# Altium PCB PCB-MAKEY_MAKEY_PTITTEAM_v1.1.PcbDoc
Units mil, origin at the board's own origin, x right, y up, seen from the top; angles counter-clockwise.
Board outline 3543.31 x 1968.5 mil, 2 copper layers (Top Layer, Bottom Layer); 48 components, 59 nets, 150 pads, 7 vias.
Unrouted connection lines stored in the file: 16.
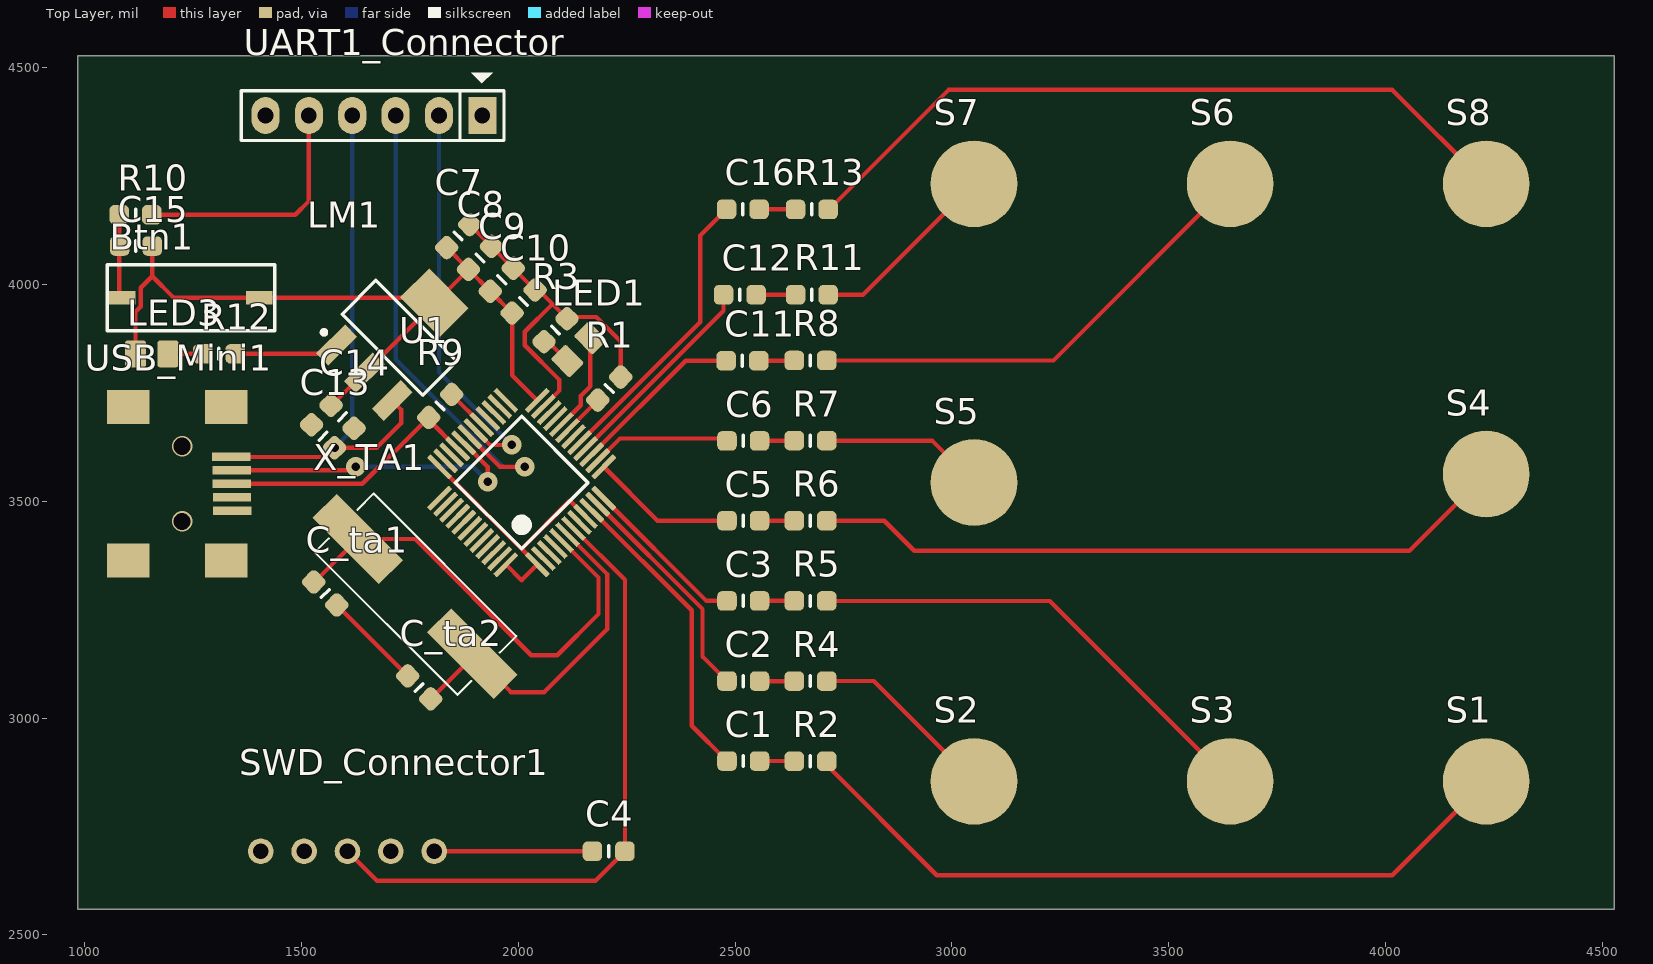
[diagram p0: Top Layer view]
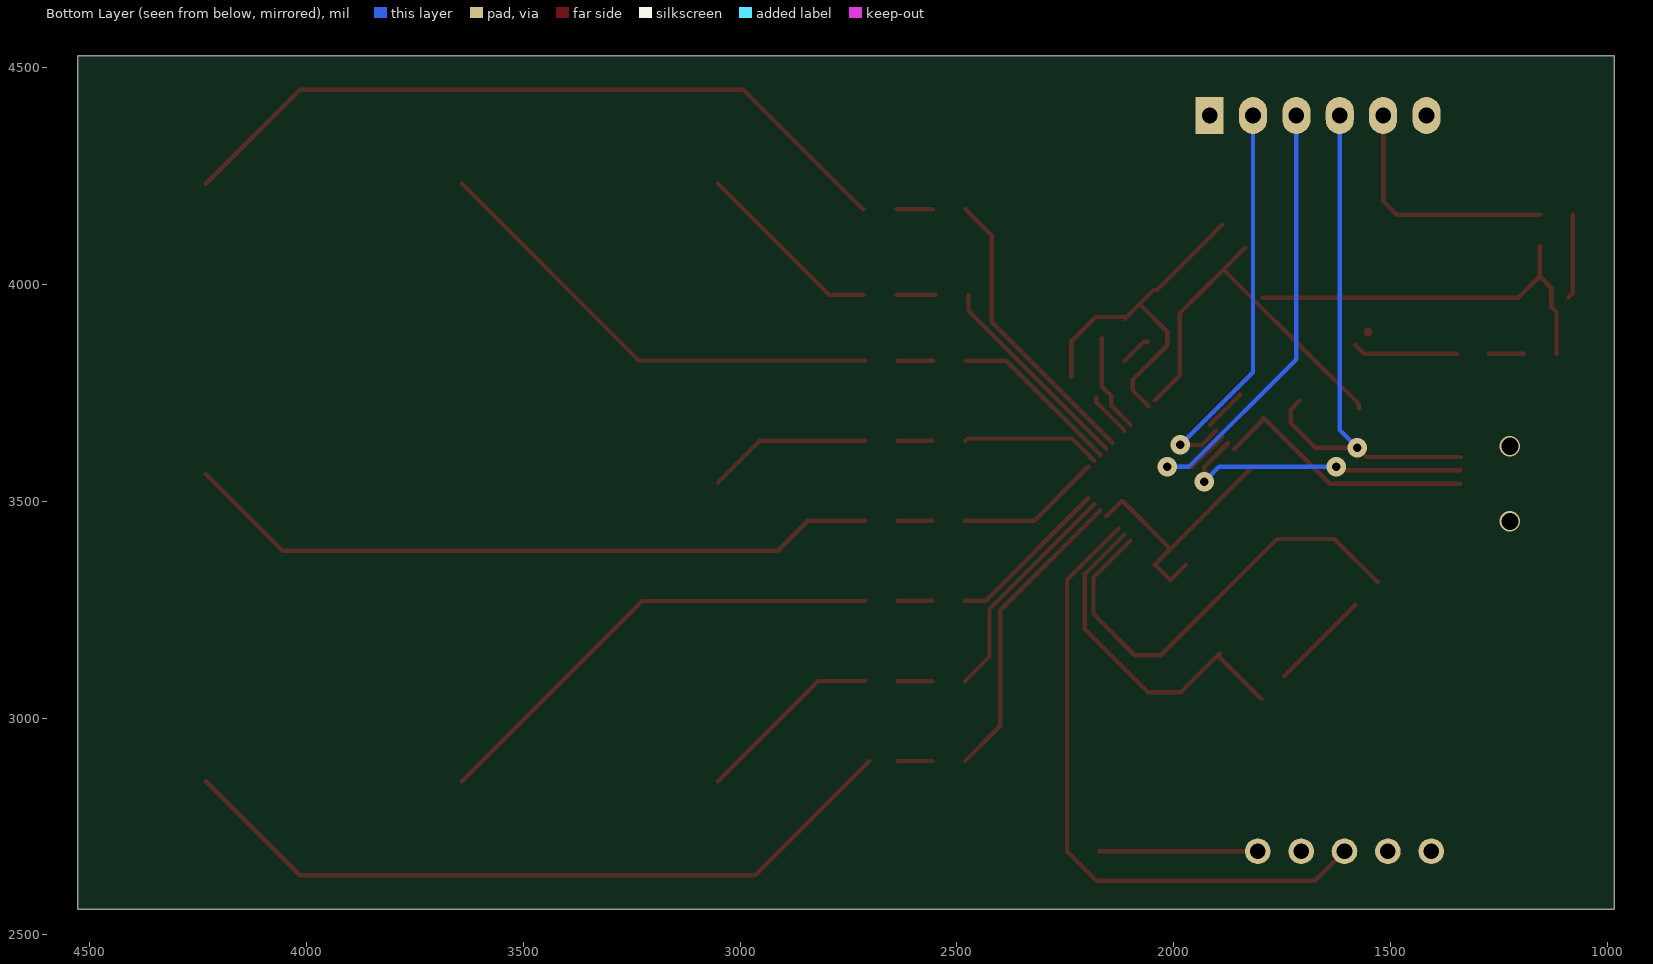
[diagram p1: Bottom Layer view, seen from below]

## Layer stack, top to bottom
Top Solder: solder mask 0.4, Solder Resist, Dk 3.5
Top Layer: signal copper 1.4
Dielectric1: dielectric 12.6, FR-4, Dk 4.8
Bottom Layer: signal copper 1.4
Bottom Solder: solder mask 0.4, Solder Resist, Dk 3.5

## Board outline
984.25,4527.56 984.25,2559.06 4527.56,2559.06 4527.56,4527.56 984.25,4527.56

## Design rules (kind name [scope] priority, off if disabled: settings)
Clearance [All] p1: gap=10 except(7: Arc-Arc Arc-SMDPad Track-SMDPad SMDPad-SMDPad; 7.5: Arc-Track Track-Track)
PolygonConnect [All] p1: connectstyle=Relief reliefconductorwidth=10 reliefentries=4 polygonreliefangle="90 Angle" airgapwidth=10
RoutingVias [All] p1: holewidth=28 width=50 viastyle="Through Hole" minholewidth=28 minwidth=50 maxholewidth=28 maxwidth=50
SolderMaskExpansion [All] p1: expansion=4
Width [All] p1: maxlimit=10 minlimit=10 preferedwidth=10
30 further rules are at their usual default settings.

## Components (designator, comment, footprint, x,y, rotation, side; value= is the part's Value field where it differs from the comment)
Btn1 "Function" Button_SMD_2pin 1245,3969.74 r0 top
C1 "104" CAP-0603 2519,2901.05 r0 top
C2 "104" CAP-0603 2519,3085.37 r0 top
C3 "104" CAP-0603 2519,3270.37 r0 top
C4 "104" CAP-0603 2208.66,2692.91 r180 top
C5 "104" CAP-0603 2519,3455.37 r0 top
C6 "104" CAP-0603 2519,3639.37 r0 top
C7 "1uF" CAP-0603 1861.52,4111.58 r225 top
C8 "1uF" CAP-0603 1911.82,4061.28 r45 top
C9 "1uF" CAP-0603 1962.12,4010.99 r225 top
C10 "1uF" CAP-0603 2012.42,3960.69 r45 top
C11 "104" CAP-0603 2517,3824.37 r0 top
C12 "104" CAP-0603 2511,3976.37 r0 top
C13 "104" CAP-0603 1550,3650 r315 top
C14 "104" CAP-0603 1595,3695 r135 top
C15 "104" CAP-0603 1118.56,4088.74 r0 top
C16 "104" CAP-0603 2518,4173.37 r0 top
C_ta1 "22pF" CAP-0603 1555.12,3287.4 r315 top
C_ta2 "22pF" CAP-0603 1771.65,3070.87 r135 top
LED1 "color" LED-0805 2140,3850 r225 top
LED3 "color" LED-0805 1155,3840 r0 top
LM1 "LM1117" SOT223-4N 1726.1,3877.23 r45 top
R1 "0R" RES-0603 2210,3760 r225 top
R2 "0R" RES-0603 2673.99,2900.67 r0 top
R3 "1k2" RES-0603 2086.01,3894.74 r225 top
R4 "0R" RES-0603 2673.99,3085.49 r0 top
R5 "0R" RES-0603 2673.99,3270.32 r0 top
R6 "0R" RES-0603 2673.99,3455.14 r0 top
R7 "0R" RES-0603 2673.99,3639.96 r0 top
R8 "0R" RES-0603 2673.99,3824.79 r0 top
R9 "1k5" RES-0603 1820,3720 r45 top
R10 "10k" RES-0603 1117.56,4160.74 r180 top
R11 "0R" RES-0603 2677.17,3976.38 r0 top
R12 "1k2" RES-0603 1310,3840 r180 top
R13 "0R" RES-0603 2677.17,4173.23 r0 top
S1 "C_Sensor" SOP2 4232.28,2854.33 r0 top
S2 "C_Sensor" SOP2 3051.18,2854.33 r0 top
S3 "C_Sensor" SOP2 3641.73,2854.33 r0 top
S4 "C_Sensor" SOP2 4232.28,3562.99 r0 top
S5 "C_Sensor" SOP2 3051.18,3543.31 r0 top
S6 "C_Sensor" SOP2 3641.73,4232.28 r0 top
S7 "C_Sensor" SOP2 3051.18,4232.28 r0 top
S8 "C_Sensor" SOP2 4232.28,4232.28 r0 top
SWD_Connector1 "" JP_5 1606.3,2692.91 r0 top
U1 "STM32F103C8T6" LQFP48_N 2007.87,3543.31 r135 top
UART1_Connector "Connector" JP6 1917.32,4389.76 r180 top
USB_Mini1 "" Micro_USB 1338.58,3602.36 r270 top
X_TA1 "8Mhz" Xtal_SMD 1762.09,3281.02 r135 top

## Footprints (in the part's own frame and the unit in brackets; to place one, negate y for a bottom-side part, rotate by r counter-clockwise, add the part's x,y. Pads: shape width x height; smd on the part's side, far side on the other; paste and mask are expansions set on the pad)
Button_SMD_2pin [mm] "Button smd 2pin"
  rect 1.55x0.8 smd: 1(-4.013,0) 2(4.013,0)
  silkscreen extent -4.9,-1.93 4.93,1.93, body extent -4.05,-1.8 3.95,1.8, height 2.53
CAP-0603 [mil] "Chip Capacitor; Body 2 x 1.2 mm (LxW typ)"
  rrect50% 45x45 smd: 1(-37.5,0) 2(37.5,0)
  silkscreen extent 0,-12 0,12, body extent -39,-24 39,24, height 28
JP6 [mil] "JP6"
  rect 65x85 hole 36: 1(0,0)
  oval 65x85 hole 36: 2(100,0) 3(200,0) 4(300,0) 5(400,0) 6(500,0)
  silkscreen extent -50,-99 556,58, body extent -48,-50 548,48, height 323
JP_5 [mm]
  round 1.5 hole 0.914: 1(-5.08,0) 2(-2.54,0) 3(0,0) 4(2.54,0) 5(5.08,0)
  body extent -6.3,-1.36 6.3,1.14, height 8.22
LED-0805 [mil] "Chip LED; Body 2 x 1.2 mm (LxW typ)"
  rrect25% 49.27x61.77 smd: 1(-37.5,0) 2(37.5,0)
  body extent -39,-25 39,25, height 31
LQFP48_N [mm] "Thin QFP, 48-Leads, Body 7x7mm, Pitch 0.5mm, IPC Medium Density"
  rrect25% 1.8x0.297 smd: 1(-4.05,2.75) 2(-4.05,2.25) 3(-4.05,1.75) 4(-4.05,1.25) 5(-4.05,0.75) 6(-4.05,0.25) 7(-4.05,-0.25) 8(-4.05,-0.75) 9(-4.05,-1.25) 10(-4.05,-1.75) 11(-4.05,-2.25) 12(-4.05,-2.75) 25(4.05,-2.75) 26(4.05,-2.25) 27(4.05,-1.75) 28(4.05,-1.25) 29(4.05,-0.75) 30(4.05,-0.25) 31(4.05,0.25) 32(4.05,0.75) 33(4.05,1.25) 34(4.05,1.75) 35(4.05,2.25) 36(4.05,2.75)
  rrect25% 0.297x1.8 smd: 13(-2.75,-4.05) 14(-2.25,-4.05) 15(-1.75,-4.05) 16(-1.25,-4.05) 17(-0.75,-4.05) 18(-0.25,-4.05) 19(0.25,-4.05) 20(0.75,-4.05) 21(1.25,-4.05) 22(1.75,-4.05) 23(2.25,-4.05) 24(2.75,-4.05) 37(2.75,4.05) 38(2.25,4.05) 39(1.75,4.05) 40(1.25,4.05) 41(0.75,4.05) 42(0.25,4.05) 43(-0.25,4.05) 44(-0.75,4.05) 45(-1.25,4.05) 46(-1.75,4.05) 47(-2.25,4.05) 48(-2.75,4.05)
  silkscreen extent -2.75,-2.75 2.75,2.75, body extent -3.5,-3.5 3.5,3.5, height 1.6
Micro_USB [mm] "Micro usb connector"
  rect 2x2.5 smd: 0(-2.929,-6.045) 0(-2.925,-0.305) 0(6.071,-6.045) 0(6.075,-0.305)
  rect 0.5x2.25 smd: 1(0,0) 2(0.787,0.013) 3(1.575,0.025) 4(2.362,0.038) 5(3.15,0.051)
  body extent -3.78,-8.83 6.92,0.37, height 3.95
RES-0603 [mil] "Chip Resistor; Body 2 x 1.2 mm (LxW typ)"
  rrect50% 45x45 smd: 1(-37.5,0) 2(37.5,0)
  silkscreen extent 0,-13 0,13, body extent -39,-24 39,24, height 28
SOP2 [mil]
  round 200 smd: 1(0,0)
SOT223-4N [mm]
  rect 2.4x1 smd: 1(-2.9,2.3) 2(-2.9,0) 3(-2.9,-2.3)
  rect 2.4x3.3 smd: 4(2.9,0)
  Top Layer circle w0.25: c-2.9,3.35 r0.125
  silkscreen extent -3.02,-3.35 1.4,3.47, body extent -3.39,-3.27 3.5,3.23, height 1.72
Xtal_SMD [mm] "Crystal smd"
  rect 5.5x2 smd: 1(-4.75,0) 2(4.75,0)
  silkscreen extent -5.84,-2.54 5.97,2.32, body extent -6.3,-2.51 6.5,2.32, height 4.3

## Part data
Btn1: library part Button_SMD_2pin, "Switch button 2 pin"
C1 C2 C3 C4 C5 C6 C9 C10 C11 C13 C14 C15: library part CM, "Cap SMD"
C7 C8 C12 C16 C_ta1 C_ta2: library part CN0, "Cremic For Xtal 1pF => 100pF"
LED1 LED3: library part Led_SMD, "Led smd"
LM1: "3v3"
R1 R2 R3 R4 R5 R6 R7 R8 R10 R11 R12 R13: library part Res_SMD_0603, "Resistor smd 0603 type"
R9: library part R, "Resistor 1/4W"
SWD_Connector1: library part Load_Program
U1: "STM32 ARM-based 32-bit MCU with 64 Kbytes Flash, 48-pin LQFP, Industrial Temperature"
UART1_Connector: library part USB2Com_Conn, "Connector to USB2Com module"
USB_Mini1: library part USB_M
X_TA1: library part XT2, "Crystal For all Crystal 2pin."

## Via types
v1: diameter 45, hole 19.68, Top Layer to Bottom Layer, 5 vias
v2: diameter 47.24, hole 39.37, Top Layer to Bottom Layer, tented both sides, 2 vias

## Nets (pads, with @x,y where several pads share a name; then routed paths per layer and width w, separated by ;. In a path a pad name is that pad's centre, name@x,y a point inside that pad or via, vN(x,y) a via of type N, cw(c..) or ccw(c..) an arc to the next point about the centre after c; other vN are vias at no path point)
GND: C4.2 C7.1 C8.2 C9.1 C10.2 C13.1 C14.1 C_ta1.2 C_ta2.2 LM1.1 R1.1 R3.1 R10.1 R12.1 SWD_Connector1.5 U1.8 U1.23 U1.35 U1.44 U1.47 UART1_Connector.5 USB_Mini1.5 | length 2270.2
  Top Layer w10: R10.1 1485.74,4160.74 1517.32,4192.32 UART1_Connector.5 ; R12.1 1560.82,3840 LM1.1 ; C_ta1.2 C_ta2.2 ; SWD_Connector1.5 C4.2 ; C7.1 C8.2 C10.2 2046.58,3987.2 2078.78,3955 ; U1.23 2095,3755.71 2095,3780 2015,3860 2015,3891.22 2078.78,3955 ; R1.1 2236.52,3868.48 2179.78,3925.22 2112.53,3925.22 R3.1 2078.78,3955
NetC1_2: C1.2 R2.1 | length 80.2
  Top Layer w10: C1.2 2636.12,2901.05 R2.1
NetC2_2: C2.2 R4.1 | length 80
  Top Layer w10: C2.2 2636.37,3085.37 R4.1
NetC3_2: C3.2 R5.1 | length 80
  Top Layer w10: C3.2 2636.44,3270.37 R5.1
NetC5_2: C5.2 R6.1 | length 80.1
  Top Layer w10: C5.2 2636.27,3455.37 R6.1
NetC6_2: C6.2 R7.1 | length 80.2
  Top Layer w10: C6.2 2635.9,3639.37 R7.1
NetC11_2: C11.2 R8.1 | length 82.2
  Top Layer w10: C11.2 2636.08,3824.37 R8.1
NetC12_2: C12.2 R11.1 | length 91.2
  Top Layer w10: C12.2 R11.1
NetC16_2: C16.2 R13.1 | length 84.2
  Top Layer w10: C16.2 2639.52,4173.37 R13.1
NetLED1_2: LED1.2 R3.2 | length 72.5
  Top Layer w10: R3.2 2068.74,3868.22 LED1.2
NetLED3_2: LED3.2 R12.2 | length 80
  Top Layer w10: LED3.2 R12.2
NetR2_2: R2.2 S1.1 | length 1728.3
  Top Layer w10: R2.2@2702.54,2900.67 2965.42,2637.8 4015.75,2637.8 S1.1
NetR4_2: R4.2 S2.1 | length 435.4
  Top Layer w10: R4.2 2820.02,3085.49 S2.1
NetR5_2: R5.2 S3.1 | length 1102.5
  Top Layer w10: R5.2 3225.75,3270.32 S3.1
NetR6_2: R6.2 S4.1 | length 1622.9
  Top Layer w10: R6.2 2844.07,3455.14 2913.39,3385.83 4055.12,3385.83 S4.1
NetR7_2: R7.2 S5.1 | length 379.7
  Top Layer w10: R7.2 2954.52,3639.96 S5.1
NetR8_2: R8.2 S6.1 | length 1099
  Top Layer w10: R8.2 3234.24,3824.79 S6.1
NetR11_2: R11.2 S7.1 | length 442.5
  Top Layer w10: R11.2 2795.28,3976.38 S7.1
NetR13_2: R13.2 S8.1 | length 1721.5
  Top Layer w10: R13.2 2716.54,4173.23 2992.13,4448.82 4015.75,4448.82 S8.1
NRST: C4.1 SWD_Connector1.3 U1.7 | length 1489.8
  Top Layer w10: SWD_Connector1.3 1674.21,2625 2178.25,2625 C4.1 2246.16,3318.94 U1.7
OSC_IN: C_ta1.1 U1.5 X_TA1.2 | length 1053
  Top Layer w10: C_ta1.1 1530.52,3313.92 X_TA1.2 1761.74,3413.26 2030,3145 2090,3145 2185,3240 2185,3324.42 U1.5
OSC_OUT: C_ta2.1 U1.6 X_TA1.1 | length 799.9
  Top Layer w10: C_ta2.1 X_TA1.1@1894.33,3140.51 ; X_TA1.1 1983.12,3060 2060,3060 2205,3205 2205,3332.26 U1.6
PA0: C1.1 U1.10 | length 707.5
  Top Layer w10: U1.10 2400,3248.62 2400,2982.55 C1.1
PA1: C2.1 U1.11 | length 531.4
  Top Layer w10: U1.11 2425,3251.46 2425,3141.87 C2.1
PA2: C3.1 U1.12 | length 382.4
  Top Layer w10: U1.12 2433.92,3270.37 C3.1
PA3: C5.1 U1.13 | length 335.7
  Top Layer w10: U1.13 2321.31,3455.37 C5.1
PA4: C6.1 U1.14 | length 321.9
  Top Layer w10: U1.14 2234.84,3645 2475.87,3645 C6.1
PA5: C11.1 U1.15 | length 400.1
  Top Layer w10: U1.15 2386.37,3824.37 C11.1
PA6: C12.1 U1.16 | length 486.9
  Top Layer w10: U1.16 2473.5,3939.34 C12.1
PA7: C16.1 U1.17 | length 678.6
  Top Layer w10: U1.17 2420,3913.67 2420,4112.87 C16.1
PA13: SWD_Connector1.2 U1.34
PA14: SWD_Connector1.1 U1.37
PA15: U1.38
PB0: U1.18
PB1: R1.2 U1.19 | length 102.3
  Top Layer w10: U1.19 2178.48,3727.84 R1.2@2178.48,3738.48
PB2: LED1.1 U1.20 | length 227.2
  Top Layer w10: U1.20 2144.32,3721.51 2144.32,3743.11 2166.52,3765.31 LED1.1
PB3: U1.39
PB4: U1.40
PB5: U1.41
PB6: U1.42
PB7: U1.43
PB8: U1.45
PB9: U1.46
PB10: U1.21
PB11: U1.22
PB12: U1.25
PB13: U1.26
PB14: U1.27
PB15: U1.28
PC13: Btn1.1 C15.1 R10.2 U1.2 | length 195.3
  Top Layer w10: R10.2 1080.06,3980.24 Btn1.1@1090.56,3969.74
PC14: U1.3
PC15: U1.4
USART1_RX: U1.31 UART1_Connector.3 | length 1117.8
  Top Layer w10: U1.31 1957.26,3580 v1(2015,3580)
  Bottom Layer w10: UART1_Connector.3 1717.32,3827.68 1965,3580 v1(2015,3580)
USART1_TX: U1.30 UART1_Connector.2 | length 925.8
  Top Layer w10: U1.30 1935.1,3630 v1(1985,3630)
  Bottom Layer w10: UART1_Connector.2 1817.32,3797.68 v1(1985,3630)
USB_5V: C13.2 LM1.3 UART1_Connector.4 USB_Mini1.1 | length 1267.8
  Top Layer w10: USB_Mini1.1 1555.4,3602.36 v1(1576.52,3623.48) 1673.48,3623.48 1730,3680 1730,3711.87 LM1.3
  Bottom Layer w10: v1(1576.52,3623.48) 1617.32,3664.29 UART1_Connector.4
USB_DISC: R9.2 U1.29 | length 98.4
  Top Layer w10: R9.2 1916.01,3677.03 U1.29
USBDM: U1.32 USB_Mini1.2 | length 722.3
  Top Layer w10: USB_Mini1.2 1616.36,3571.36 v1(1625,3580) ; U1.32 1930,3579.42 v1(1930,3545)
  Bottom Layer w10: v1(1625,3580) 1895,3580 v1(1930,3545)
USBDP: R9.1 U1.33 USB_Mini1.3 | length 617.2
  Top Layer w10: USB_Mini1.3 1640.36,3540.36 R9.1 1793.48,3688.1 U1.33
VCC: Btn1.2 C7.2 C8.1 C9.2 C10.1 C14.2 C15.2 LED3.1 LM1.2 LM1.4 SWD_Connector1.4 U1.1 U1.9 U1.24 U1.36 U1.48 | length 2443.3
  Top Layer w10: LED3.1 1117.5,3937.01 1129.51,3949.02 1129.51,3992.39 1156.06,4018.94 ; C15.2 1156.06,4018.94 ; C14.2@1573.23,3714.11 1573.23,3724.36 LM1.2 1647.03,3796.5 C8.1 ; LM1.4@1795.06,3969.74 1205.26,3969.74 1156.06,4018.94 ; U1.36 2007.87,3390.19 2008.07,3390 ; C7.2 C8.1 ; U1.48 2007.87,3317.81 U1.1 2008.07,3390 ; U1.24 1985.9,3790.78 C10.1 C9.2 C8.1 ; U1.9 2120.78,3500 2117.68,3500 2007.68,3390 2008.07,3390
pads on no net: UART1_Connector.1 UART1_Connector.6 USB_Mini1.0 USB_Mini1.4
copper on no net:
  other v2: 1225.01,3453.75 1225.01,3626.98